# Altium PCB Sensors.PcbDoc
Units mil, origin at the board's own origin, x right, y up, seen from the top; angles counter-clockwise.
Board outline 6000 x 4000 mil, 2 copper layers (Top Layer, Bottom Layer); 18 components, 13 nets, 68 pads, 0 vias.
Unrouted connection lines stored in the file: 47.
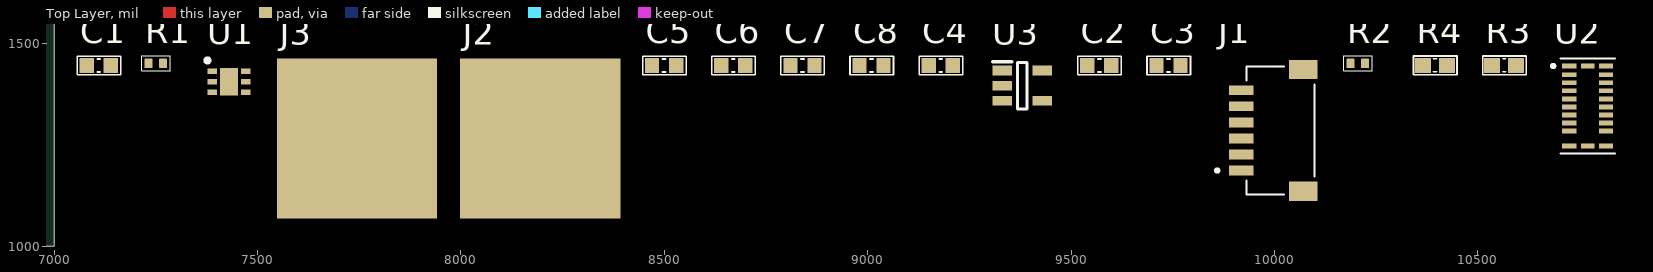
[diagram p0: Top Layer view]
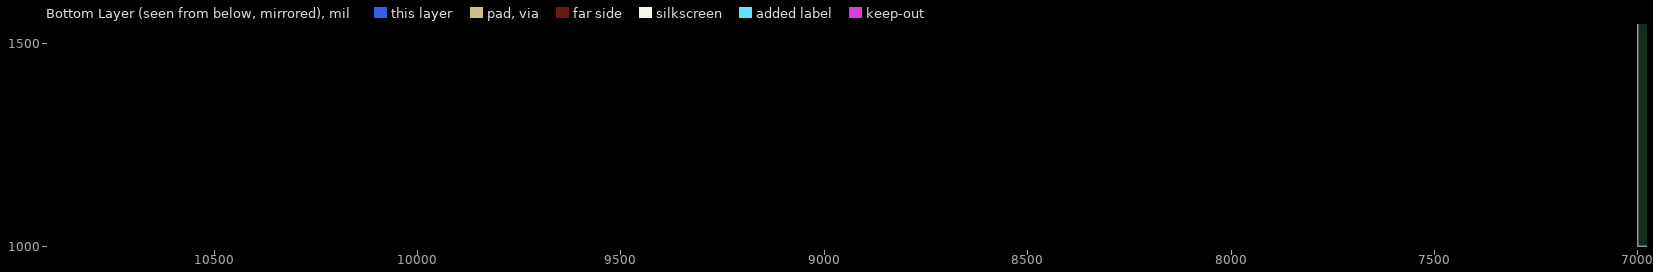
[diagram p1: Bottom Layer view, seen from below]

## Layer stack, top to bottom
Top Solder: solder mask 0.4, Solder Resist, Dk 3.5
Top Layer: signal copper 1.4
Dielectric 1: dielectric 12.6, FR-4, Dk 4.8
Bottom Layer: signal copper 1.4
Bottom Solder: solder mask 0.4, Solder Resist, Dk 3.5

## Board outline
1000,1000 7000,1000 7000,5000 1000,5000

## Design rules (kind name [scope] priority, off if disabled: settings)
Clearance [All] p1: gap=10 ignorepadtopadclearanceinfootprint=FALSE except(0: Arc-Hole Track-Hole SMDPad-Hole THPad-Hole Via-Hole Fill-Hole Poly-Hole Region-Hole Text-Hole)
PolygonConnect [All] p1: connectstyle=Relief reliefconductorwidth=10 reliefentries=4 polygonreliefangle="90 Angle" airgapwidth=10
RoomDefinition Sensors [InComponentClass('Sensors')] p1: confinementstyle=ConfineIn formatcopy=TRUE lockcomponents=FALSE outline 7045,1055 10855,1055 10855,1575 7045,1575
RoutingVias [All] p1: holewidth=28 width=50 viastyle="Through Hole" minholewidth=28 minwidth=50 maxholewidth=28 maxwidth=50
SolderMaskExpansion [All] p1: expansion=4 istentingtop=FALSE
Width [All] p1: maxlimit=10 minlimit=10 preferedwidth=10
30 further rules are at their usual default settings.

## Components (designator, comment, footprint, x,y, rotation, side; value= is the part's Value field where it differs from the comment)
C1 "100nF" "Cap 0603" 7110,1445 r0 top
C2 "1uF" "Cap 0603" 9570,1445 r0 top
C3 "1uF" "Cap 0603" 9740,1445 r0 top
C4 "1uF" "Cap 0603" 9180,1445 r0 top
C5 "1uF" "Cap 0603" 8500,1445 r0 top
C6 "100nF" "Cap 0603" 8670,1445 r0 top
C7 "10nF" "Cap 0603" 8840,1445 r0 top
C8 "100nF" "Cap 0603" 9010,1445 r0 top
J1 "10147606-00006LF" AMPHENOL_10147606-00006LF 10015,1285 r90 top
J2 "ECD Pad" "ECG Pad" 8055,1025 r0 top
J3 "ECD Pad" "ECG Pad" 7605,1025 r0 top
R1 "1k" "RES 0402" 7250,1450 r0 top
R2 "1k" "RES 0402" 10205,1450 r0 top
R3 "4k7" "RES 0603" 10565,1445 r0 top
R4 "4k7" "RES 0603" 10395,1445 r0 top
U1 "TMP117MAIDRVT" SON65P200X200X80-7N 7430,1405 r0 top
U2 "MAX86150EFF+-ND" MAX86150EFF+ 10770,1345 r0 top
U3 "TPS73218DBVR" SOT95P280X145-5N 9380,1395 r0 top

## Footprints (in the part's own frame and the unit in brackets; to place one, negate y for a bottom-side part, rotate by r counter-clockwise, add the part's x,y. Pads: shape width x height; smd on the part's side, far side on the other; paste and mask are expansions set on the pad)
AMPHENOL_10147606-00006LF [mm]
  rect 0.6x1.55 smd: 01(-2.5,2.45) 02(-1.5,2.45) 03(-0.5,2.45) 04(0.5,2.45) 05(1.5,2.45) 06(2.5,2.45)
  rect 1.2x1.8 smd: SH1(-3.8,-1.425) SH2(3.8,-1.425)
  silkscreen extent -4,-2.12 4,4.05, body extent -4,-2.12 4,2.83, height 2.9
"Cap 0603" [mil]
  rect 35x37.4 smd mask+3: 1(-29.83,-0.32) 2(29.23,-0.32)
  silkscreen extent -53,-23 54,23, body extent -30,-16 32,15, height 31
"ECG Pad" [mil] "1cm x 1cm ECG PAD"
  rect 393.7x393.7 smd: 1(140,240)
MAX86150EFF+ [mm]
  rect 0.9x0.3 smd: 1(-1.15,2.5) 2(-1.15,1.95) 3(-1.15,1.45) 4(-1.15,0.95) 5(-1.15,0.45) 6(-1.15,-0.05) 7(-1.15,-0.55) 8(-1.15,-1.05) 9(-1.15,-1.55) 10(-1.15,-2.5) 12(1.15,-2.5) 13(1.15,-1.55) 14(1.15,-1.05) 15(1.15,-0.55) 16(1.15,-0.05) 17(1.15,0.45) 18(1.15,0.95) 19(1.15,1.45) 20(1.15,1.95) 21(1.15,2.5)
  rect 0.85x0.3 smd: 11(0,-2.5) 22(0,2.5)
  silkscreen extent -2.25,-2.96 1.7,2.96, body extent -1.65,-2.8 1.65,2.8, height 1.4
"RES 0402" [mm]
  rrect20% 0.49x0.6 smd: 1(-0.455,0) 2(0.455,0)
  silkscreen extent -0.89,-0.46 0.89,0.48, body extent -0.47,-0.25 0.53,0.25, height 0.32
"RES 0603" [mm] "RES 0603"
  rect 1x0.95 smd mask+0.076: 1(-0.75,0) 2(0.75,0)
  silkscreen extent -1.35,-0.58 1.37,0.58, body extent -0.8,-0.4 0.8,0.4, height 0.45
SON65P200X200X80-7N [mm]
  rect 0.6x0.35 smd: 1(-1.05,0.65) 2(-1.05,0) 3(-1.05,-0.65) 4(1.05,-0.65) 5(1.05,0) 6(1.05,0.65)
  rect 1.1x1.7 smd: 7(0,0)
  silkscreen extent -1.47,1.2 -1.22,1.45, body extent -1.05,-1 1.05,1, height 0.8
SOT95P280X145-5N [mm]
  rect 1.2x0.6 smd: 1(-1.25,0.95) 2(-1.25,0) 3(-1.25,-0.95) 4(1.25,-0.95) 5(1.25,0.95)
  silkscreen extent -1.85,-1.45 0.3,1.5, body extent -1.4,-1.45 1.4,1.45, height 1.2

## Part data
C1 C2 C3 C4 C5 C6 C7 C8: library part "Cap 0603", "Capacitor SMD 0603"
J1: "Minitek 1.0mm R/A SMT Header, 6 Positions, Tin Plating, Natural Color", Package=None, Check_prices=https://www.snapeda.com/parts/10147606-00006LF/Amphenol/view-part/?ref=eda, MF=Amphenol, MP=10147606-00006LF, SnapEDA_Link=https://www.snapeda.com/parts/10147606-00006LF/Amphenol/view-part/?ref=snap
J2 J3: library part "ECG Pad", "1cm x 1cm ECG Pad"
R1 R2: library part "RES 0402", "RES SMD 0402", Manufacturer="Vishay Dale", Manufacturer Part Number=CRCW040210K0FKED, Operating Temperature="-55°C ~ 155°C", Package / Case="0402 (1005 Metric)", Power (Watts)="0.063W, 1/16W", Resistance (Ohms)=10k, Supplier Part Number 1=541-10.0KLCT-ND, Temperature Coefficient=±100ppm/°C, Tolerance=±1%, Category=Resistors, ComponentLink1Description=http://www.vishay.com/docs/20035/dcrcwe3.pdf, ComponentLink1URL=http://www.vishay.com/docs/20035/dcrcwe3.pdf, Composition="Thick Film", Features="Automotive AEC-Q200", Height="0.016\" (0.40mm)", Number of Terminations=2, Packaging="Cut Tape (CT)", Pricing 1="10=0.083, 50=0.0444, 200=0.0255, 1000=0.0174 (USD)", RoHS="RoHS Compliant", Size / Dimension="0.039\" L x 0.020\" W (1.00mm x 0.50mm)", Stock 1=2392462, Supplier 1=Digi-Key, Supplier Device Package="0402 (1005 Metric)"
R3 R4: library part "RES 0603", "RES SMD 0603", Manufacturer="Vishay Dale", Manufacturer Part Number=CRCW040210K0FKED, Operating Temperature="-55°C ~ 155°C", Package / Case="0402 (1005 Metric)", Power (Watts)="0.063W, 1/16W", Resistance (Ohms)=10k, Supplier Part Number 1=541-10.0KLCT-ND, Temperature Coefficient=±100ppm/°C, Tolerance=±1%, Category=Resistors, ComponentLink1Description=http://www.vishay.com/docs/20035/dcrcwe3.pdf, ComponentLink1URL=http://www.vishay.com/docs/20035/dcrcwe3.pdf, Composition="Thick Film", Features="Automotive AEC-Q200", Height="0.016\" (0.40mm)", Number of Terminations=2, Packaging="Cut Tape (CT)", Pricing 1="10=0.083, 50=0.0444, 200=0.0255, 1000=0.0174 (USD)", RoHS="RoHS Compliant", Size / Dimension="0.039\" L x 0.020\" W (1.00mm x 0.50mm)", Stock 1=2392462, Supplier 1=Digi-Key, Supplier Device Package="0402 (1005 Metric)"
U1: "Integrated Circuit", Manufacturer_Name="Texas Instruments", Mouser Part Number=595-TMP117MAIDRVT, Arrow Part Number=TMP117MAIDRVT, Arrow Price/Stock=https://www.arrow.com/en/products/tmp117maidrvt/texas-instruments?utm_currency=USD&region=nac, Datasheet Link=http://www.ti.com/lit/ds/symlink/tmp117.pdf, Height=0.8mm, Manufacturer_Part_Number=TMP117MAIDRVT, Mouser Price/Stock=https://www.mouser.co.uk/ProductDetail/Texas-Instruments/TMP117MAIDRVT?qs=qSfuJ%252Bfl%2Fd7%252B0%2FufpTVPxA%3D%3D
U2: library part MAX86150EFF+T, "SENSOR - OXIMETER/HEART RATE I2C", Package="OLGA-22 Maxim", Check_prices=https://www.snapeda.com/parts/MAX86150EFF+/Analog+Devices/view-part/?ref=eda, MF="Analog Devices", MP=MAX86150EFF+, SnapEDA_Link=https://www.snapeda.com/parts/MAX86150EFF+/Analog+Devices/view-part/?ref=snap
U3: "Integrated Circuit", Manufacturer_Name="Texas Instruments", Mouser Part Number=595-TPS73218DBVR, Datasheet Link=http://www.ti.com/lit/gpn/TPS732, Height=1.45mm, Manufacturer_Part_Number=TPS73218DBVR, Mouser Price/Stock=https://www.mouser.com/Search/Refine.aspx?Keyword=595-TPS73218DBVR

## Nets (pads, with @x,y where several pads share a name; then routed paths per layer and width w, separated by ;. In a path a pad name is that pad's centre, name@x,y a point inside that pad or via, vN(x,y) a via of type N, cw(c..) or ccw(c..) an arc to the next point about the centre after c; other vN are vias at no path point)
1V8: C2.1 C3.1 C8.1 U2.13 U2.14 U3.5
3V3: C1.1 C6.1 J1.01 R1.1 R2.1 R3.2 R4.2 U1.5 U2.15 U3.1 U3.3
ALERT: J1.05 R2.2 U1.3
ECG_N: J2.1 U2.4
ECG_P: J3.1 U2.5
GND: C1.2 C2.2 C3.2 C5.2 C6.2 C7.2 C8.2 J1.04 J1.SH1 J1.SH2 U1.2 U1.4 U1.7 U2.16 U2.17 U2.18 U3.2
I2C_SCL: J1.03 R4.1 U1.1 U2.9
I2C_SDA: J1.02 R3.1 U1.6 U2.8
INTB: J1.06 R1.2 U2.7
NetC4_1: C4.1 U2.20
NetC4_2: C4.2 U2.21
NetC5_1: C5.1 U2.19
NetC7_1: C7.1 U3.4
pads on no net: U2.1 U2.2 U2.3 U2.6 U2.10 U2.11 U2.12 U2.22